# Altium PCB PCB1.PcbDoc
Units mm, origin at the board's own origin, x right, y up, seen from the top; angles counter-clockwise.
Board outline 52.13 x 53.59 mm, 2 copper layers (Top Layer, Bottom Layer); 16 components, 12 nets, 36 pads, 0 vias.
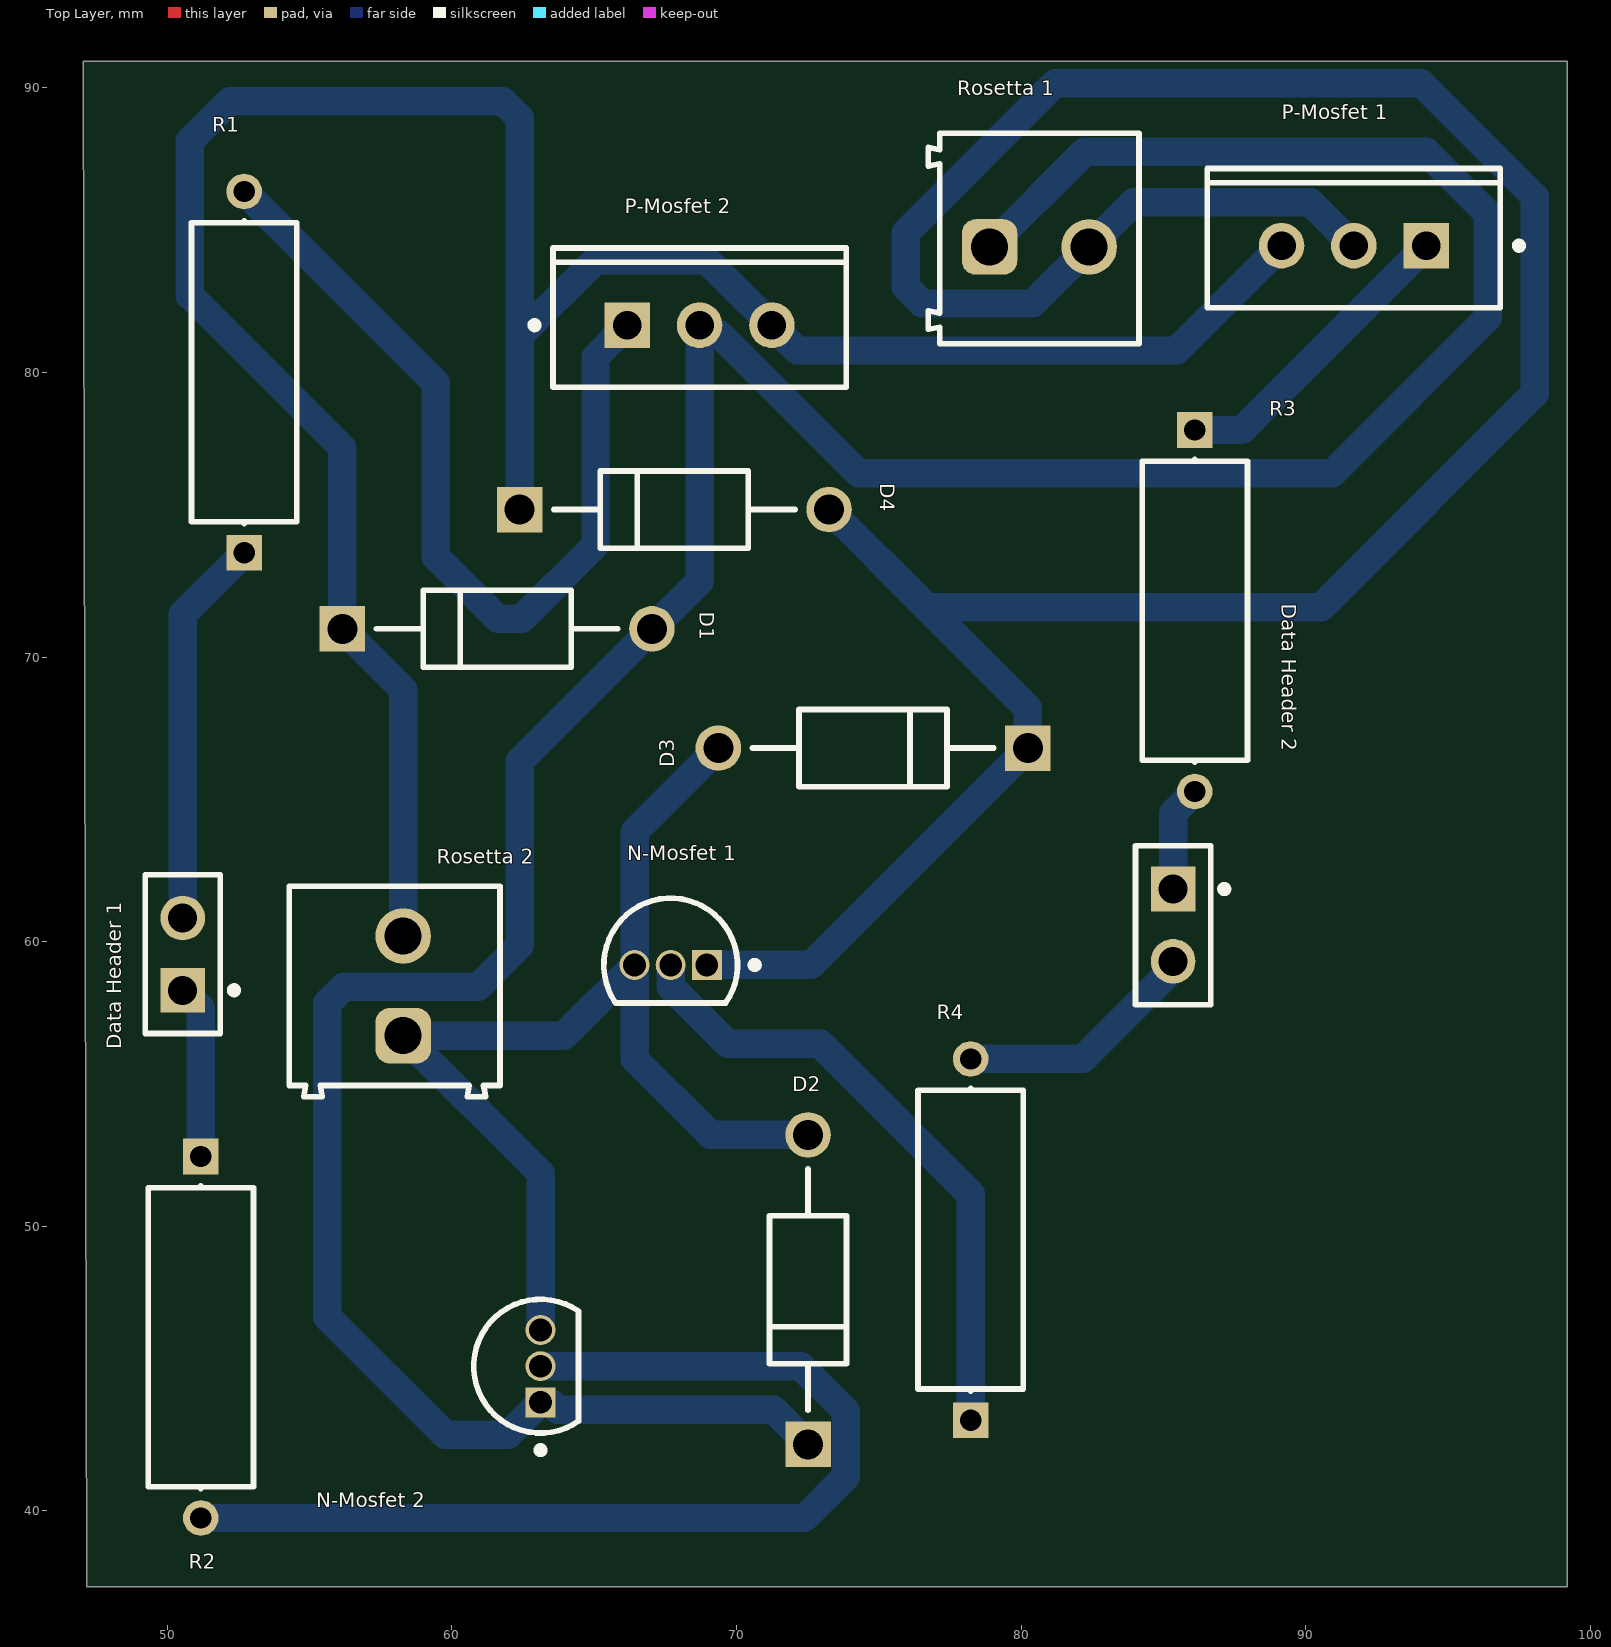
[diagram p0: Top Layer view]
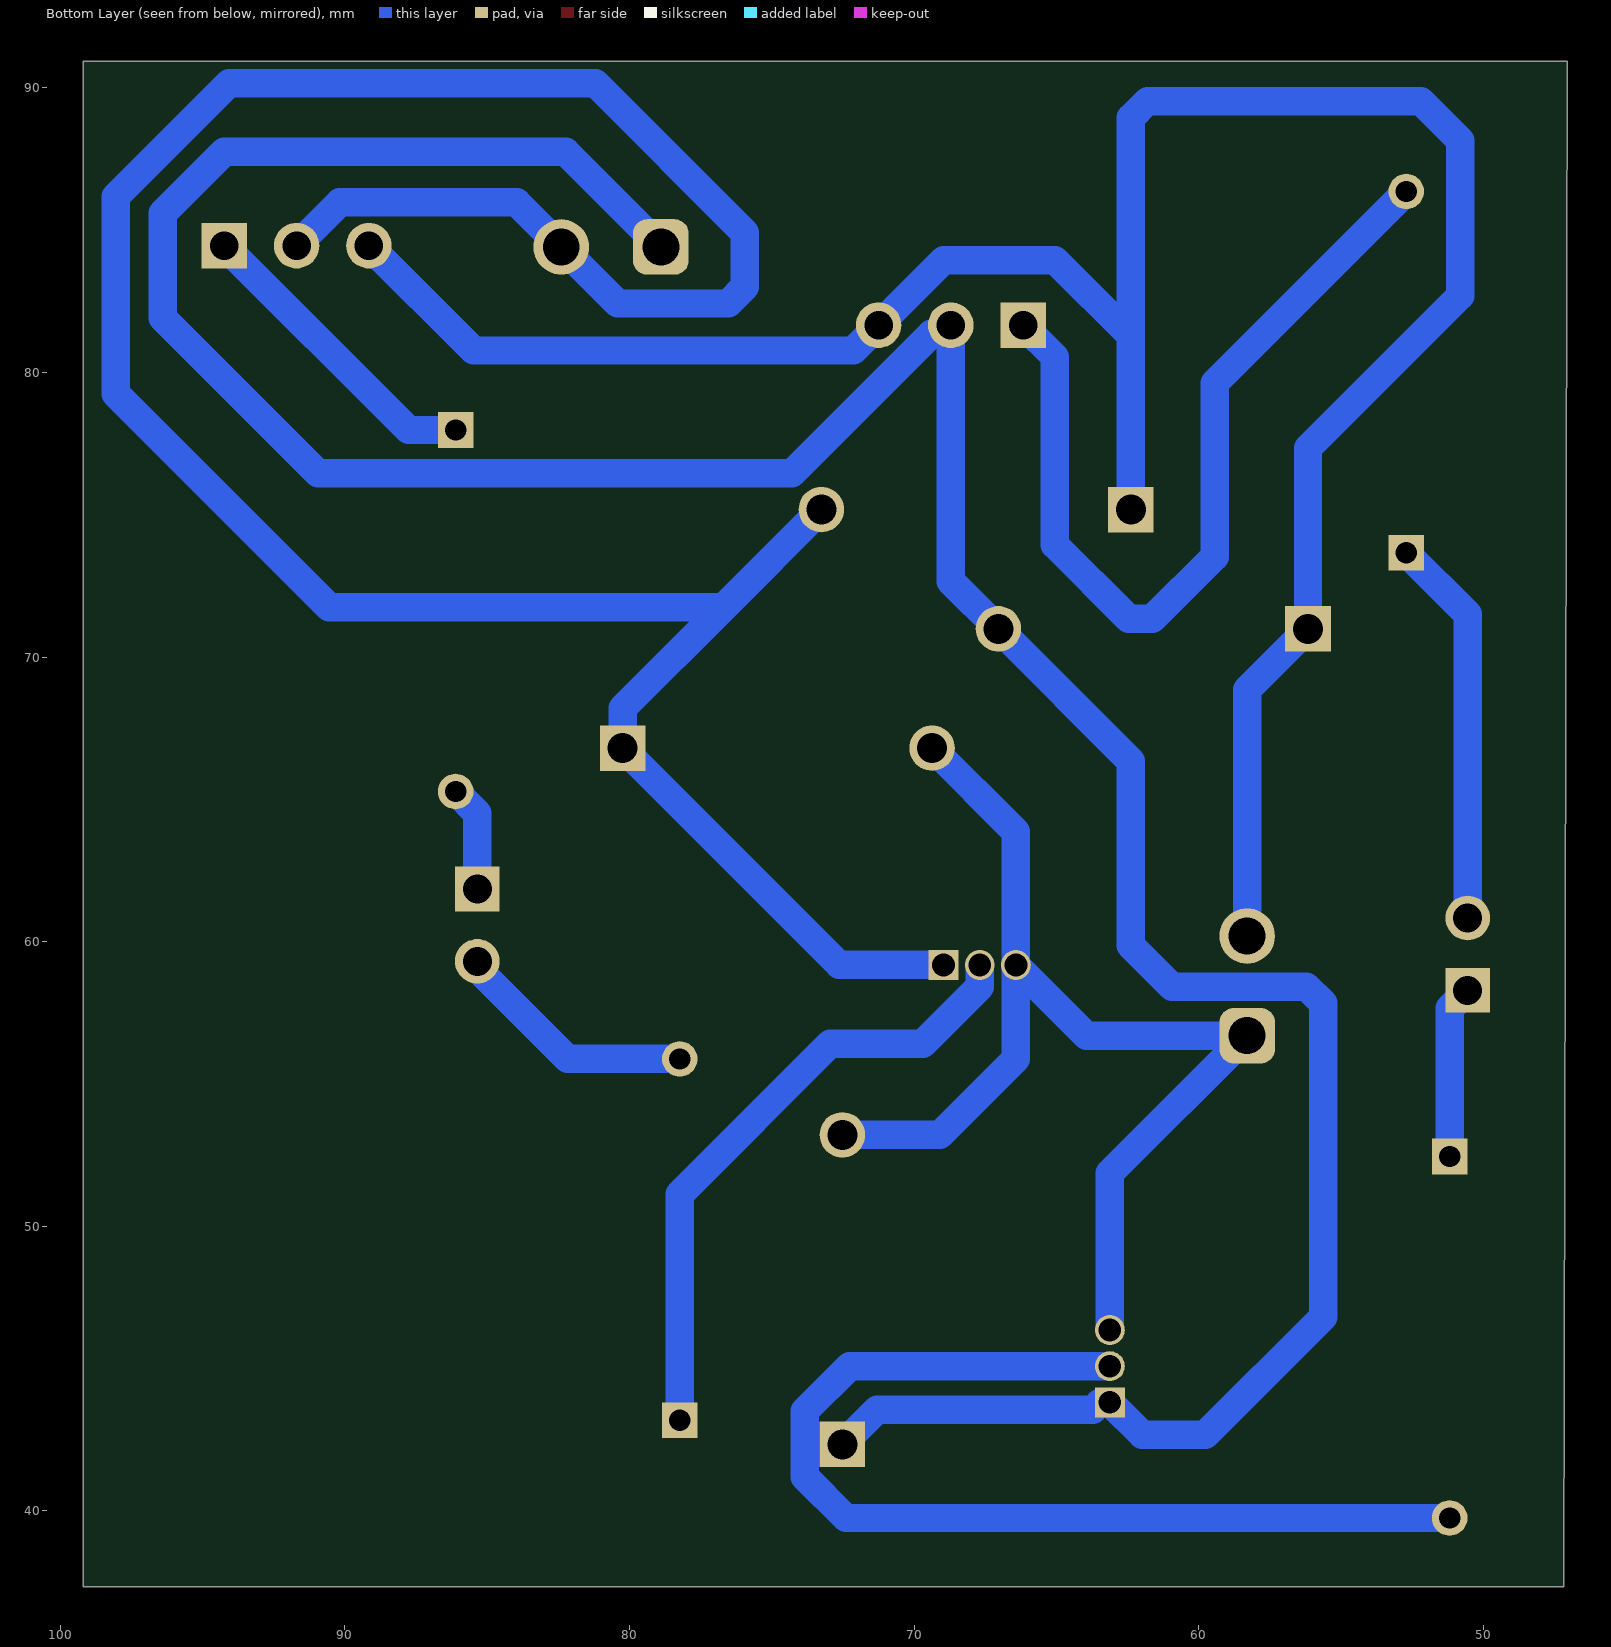
[diagram p1: Bottom Layer view, seen from below]
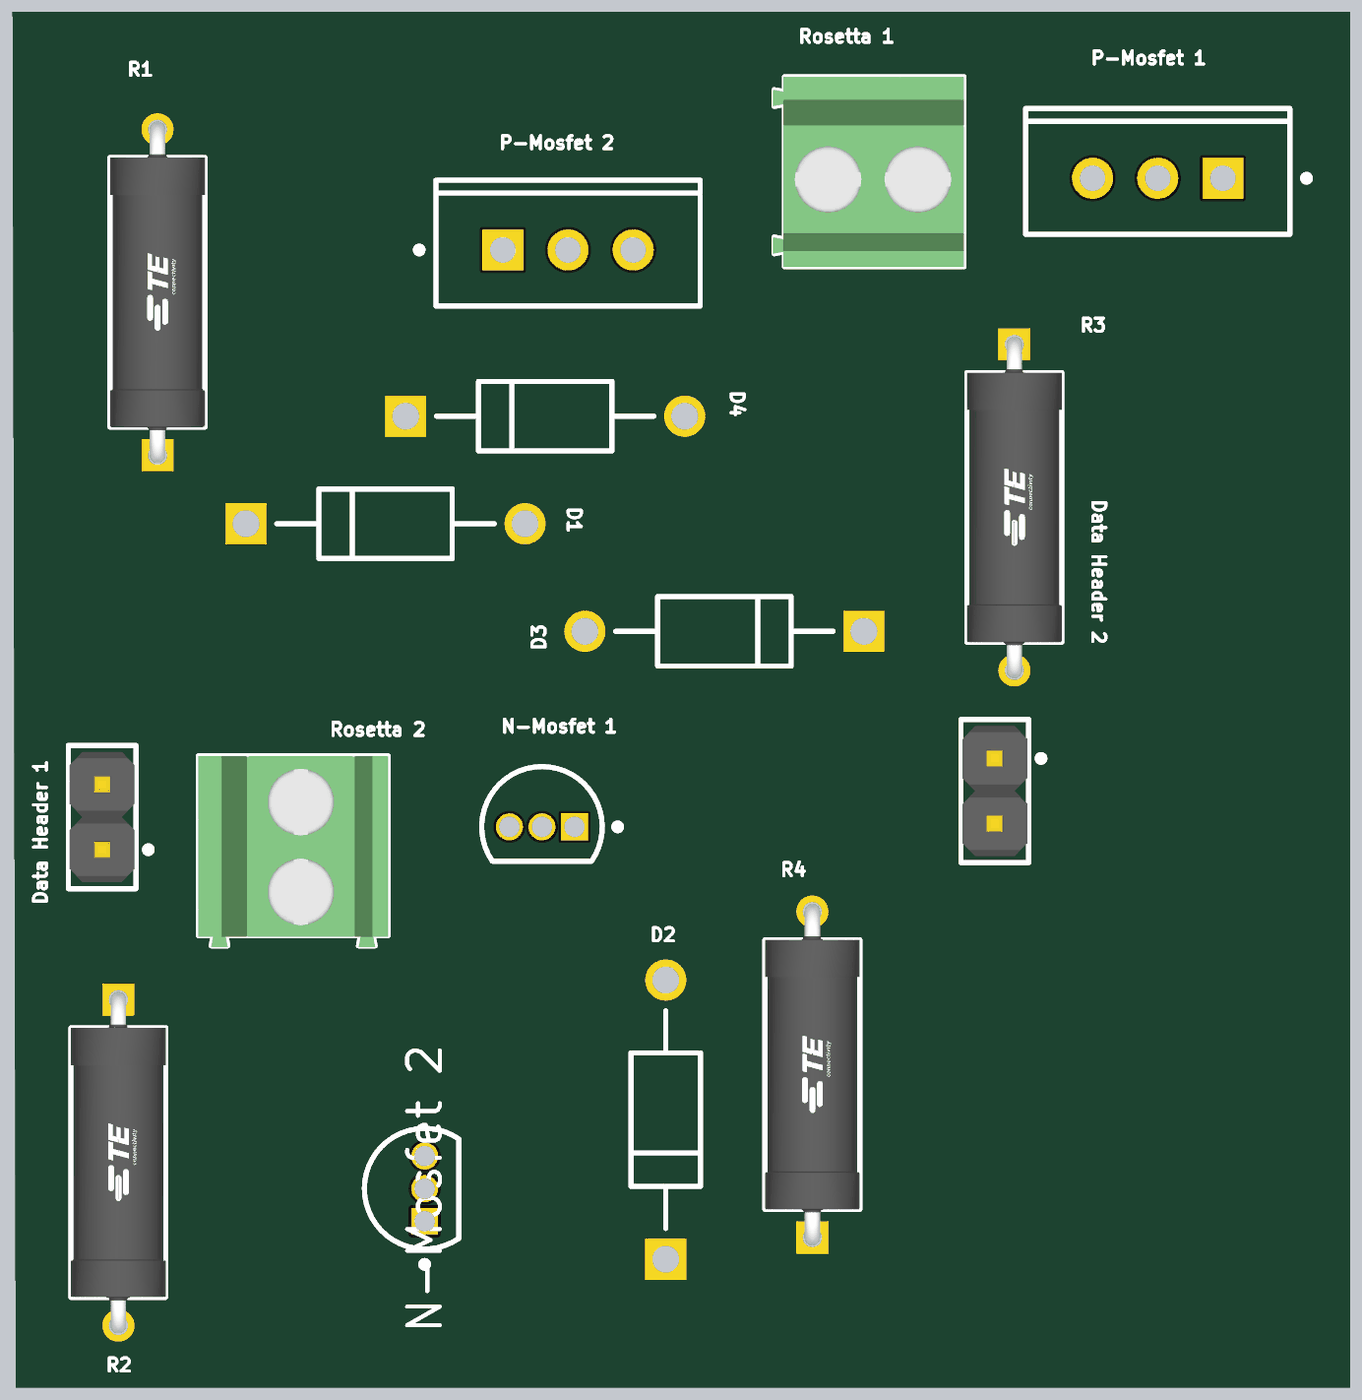
[diagram p2: 3D render of the assembled board from above, using the file's embedded part models]

## Layer stack, top to bottom
Top Solder: solder mask 0.0102, Solder Resist, Dk 3.5
Top Layer: signal copper 0.0356
Dielectric 1: dielectric 0.32, FR-4, Dk 4.8
Bottom Layer: signal copper 0.0356
Bottom Solder: solder mask 0.0102, Solder Resist, Dk 3.5

## Board outline
47.054,90.932 99.187,90.932 99.187,39.116 99.187,37.338 47.179,37.338

## Design rules (kind name [scope] priority, off if disabled: settings)
Clearance [All] p1: gap=0.01 ignorepadtopadclearanceinfootprint=FALSE
PolygonConnect [All] p1: connectstyle=Relief reliefconductorwidth=0.254 reliefentries=4 polygonreliefangle="90 Angle" airgapwidth=0.254
RoutingVias [All] p1: holewidth=0.711 width=1.27 viastyle="Through Hole" minholewidth=0.711 minwidth=1.27 maxholewidth=0.711 maxwidth=1.27
SolderMaskExpansion [All] p1: expansion=0.102 istentingtop=FALSE
UnRoutedNet [All] p1: checkbadconnections=TRUE
Width [All] p1: maxlimit=1 minlimit=0.75 preferedwidth=1
29 further rules are at their usual default settings.

## Components (designator, comment, footprint, x,y, rotation, side; value= is the part's Value field where it differs from the comment)
D1 "1N5817" FP-DO-41-MFG 61.595,70.993 r0 top
D2 "1N5817" FP-DO-41-MFG 72.517,47.775 r90 top
D3 "1N5817" FP-DO-41-MFG 74.803,66.802 r180 top
D4 "1N5817" FP-DO-41-MFG 67.818,75.184 r0 top
"Data Header 1" "M20-9990245" FP-M20-9990245-MFG 50.546,59.563 r90 top
"Data Header 2" "M20-9990245" FP-M20-9990245-MFG 85.344,60.579 r270 top
"N-Mosfet 1" "BS170" ONSC-TO-92-3-29-11 67.691,59.182 r180 top
"N-Mosfet 2" "BS170" ONSC-TO-92-3-29-11 63.119,45.085 r90 top
"P-Mosfet 1" "NTP2955" ONSC-TO-220-3-221A-09_AA#1 91.694,84.455 r90 top
"P-Mosfet 2" "NTP2955" ONSC-TO-220-3-221A-09_AA#2 68.707,81.661 r90 top
R1 "H45K0BAA" FP-H45K0BAA-MFG 52.705,80.01 r90 top
R2 "H45K0BAA" FP-H45K0BAA-MFG 51.181,46.101 r270 top
R3 "H45K0BAA" FP-H45K0BAA-MFG 86.106,71.628 r270 top
R4 "H45K0BAA" FP-H45K0BAA-MFG 78.232,49.53 r90 top
"Rosetta 1" "691214110002" 691214110002 80.645,84.709 r0 top
"Rosetta 2" "691214110002" 691214110002 57.993,58.448 r90 top

## Footprints (in the part's own frame and the unit in brackets; to place one, negate y for a bottom-side part, rotate by r counter-clockwise, add the part's x,y. Pads: shape width x height; smd on the part's side, far side on the other; paste and mask are expansions set on the pad)
691214110002 [mm] "3.50 mm Horizontal Entry Modular, 2p"
  rrect50% 1.95x1.95 hole 1.3: 1(-1.75,-0.3)
  round 1.95 hole 1.3: 2(1.75,-0.3)
  silkscreen extent -3.9,-3.7 3.5,3.7, body extent -3.95,-3.7 3.5,3.7, height 8.55
FP-DO-41-MFG [mm]
  rect 1.6x1.6 hole 1.05 paste-2539.97 mask+0: 1(-5.438,0)
  round 1.6 hole 1.05 paste-2539.97 mask+0: 2(5.438,0)
  silkscreen extent -4.24,-1.35 4.24,1.35
FP-H45K0BAA-MFG [mm]
  rect 1.25x1.25 hole 0.75 paste-2539.97 mask+0: 1(-6.35,0)
  round 1.25 hole 0.75 paste-2539.97 mask+0: 2(6.35,0)
  silkscreen extent -5.33,-1.85 5.33,1.85, body extent -7.07,-1.95 7.07,1.95, height 0.25
FP-M20-9990245-MFG [mm]
  rect 1.57x1.57 hole 1.02 paste-2539.97 mask+0: 1(-1.27,0)
  round 1.57 hole 1.02 paste-2539.97 mask+0: 2(1.27,0)
  silkscreen extent -2.79,-1.92 2.79,1.32, body extent -2.89,-1.42 2.89,1.42, height 0.25
ONSC-TO-92-3-29-11 [mm] "TO, 3-Leads, Body Dia 4.7mm, Pitch 1.27mm"
  rect 1.05x1.05 hole 0.8: 1(-1.27,0)
  round 1.05 hole 0.8: 2(0,0) 3(1.27,0)
  silkscreen extent -3.08,-2.35 2.35,1.34, body extent -2.35,-2.36 2.36,1.33, height 7.87
ONSC-TO-220-3-221A-09_AA#1 [mm] "FM, 3-Leads, Body 10.3x4.85mm, Pitch 2.54mm"
  rect 1.6x1.6 hole 1: 1(0,-2.54)
  round 1.6 hole 1: 2(0,0) 3(0,2.54)
  silkscreen extent -2.19,-5.93 2.72,5.15, body extent -2.16,-5.15 2.69,5.15, height 19.68
ONSC-TO-220-3-221A-09_AA#2 [mm] "FM, 3-Leads, Body 10.3x4.85mm, Pitch 2.54mm"
  rect 1.6x1.6 hole 1: 1(0,2.54)
  round 1.6 hole 1: 2(0,0) 3(0,-2.54)
  silkscreen extent -2.19,-5.15 2.72,5.92, body extent -2.16,-5.15 2.69,5.15, height 19.68

## Part data
D1 D2 D3 D4: library part CMP-12187-000037-1, "DIODE SCHOTTKY 20V 1A DO41", Average Rectified Current=1A, Capacitance=110pF, Case/Package=DO-41, Forward Voltage=450mV, Max Forward Surge Current (Ifsm)=25A, Max Operating Temperature=150°C, Max Repetitive Reverse Voltage (Vrrm)=20V, Max Reverse Current=500uA, Min Operating Temperature=-65°C, Package Quantity=2000, Current Rating=1A, Element Configuration=Single, Forward Current=1A, Height=2.7mm, Lead Free="Lead Free", Length=5.2mm, Max Reverse Leakage Current=500uA, Max Reverse Voltage (DC)=20V, Max Surge Current=25A, Mount="Through Hole", Number of Pins=2, Output Current=1A, Packaging="Cut Tape", Peak Non-Repetitive Surge Current=25A, Polarity=Standard, Radiation Hardening=No, REACH SVHC="No SVHC", RoHS Compliant=Yes, Series=-, Voltage Rating (DC)=20V, Weight=0.01lb, Width=2.7mm
"Data Header 1" "Data Header 2": library part CMP-15831-000105-1, "CONN HEADER VERT 2POS 2.54MM", Case/Package=SIL, Color=Black, Contact Resistance=25mR, Current=3A, Flammability Rating="UL94 V-0", Insulation Resistance=10GR, Max Operating Temperature=105°C, Min Operating Temperature=-40°C, Package Quantity=1000, Voltage=50V, Voltage Rating (AC)=750V, Connector Type="Male Pin", Contact Finish - Mating=GOLD, Contact Material=Brass, Contact Mating Length=0.24inch, Contact Plating=Gold, Contact Shape=Square, Contact Type="Male Pin", Current Rating=3A, Depth=2.54mm, Fastening Type=Pull, Gender=Male, Height=0.12inch, Housing Color=Black, Housing Material=Nylon, Insulation Color=Black, Insulation Material=Nylon, Lead Pitch=2.54mm, Length=5.08mm, Mated Stacking Heights=16.54mm, Mating Cycles=300, Max Current Rating=3A, Mount="Through Hole", Number Of Contacts=2, Number of Poles=2, Number of Positions=2, Number Of Rows=1, Orientation=Straight, Packaging=Bulk, Pitch=2.54mm, Radiation Hardening=No, Reach SVHC Compliant=Yes, Series=M20, Termination=Solder, Weight=0.25lb, Width=0.25inch, Working Voltage=750V
"N-Mosfet 1" "N-Mosfet 2": library part CMP-1058-00929-1, "Small Signal MOSFET, 500 mA, 60 V, N-Channel, 3-Pin TO-92, Bulk Box", Manufacturer="On Semiconductor", Package Type=TO-92, Channel Polarity="N Channel", ComponentLink1Description="Manufacturer URL", ComponentLink1URL=http://www.onsemi.com/, ComponentLink2Description=Datasheet, ComponentLink2URL=http://www.onsemi.com/pub_link/Collateral/BS170-D.PDF, ComponentLink3Description="Package Specification", ComponentLink3URL=http://www.onsemi.cn/pub_link/Collateral/2N6426-D.PDF, Configuration=Single, DatasheetVersion="Rev. 6", ID Max (A)=0.5, Mounting Technology="Through Hole", PackageDescription="3-Pin Transistor Outline, Body 4.825 x 3.685 mm, Pitch 1.27 mm", PackageReference=TO-92-3-29-11_AM_SL, PackageVersion="Rev. AM", Packing="Bulk Box", PartNumber=BS170, PD Max (W)=0.35, V(BR)DSS Min (V)=60, VGS Max (V)=20, VGS(th) Max (V)=3
"P-Mosfet 1" "P-Mosfet 2": library part CMP-1058-00865-1, "Power MOSFET, -60 V, -12 A, Single P-Channel, 3-Pin TO-220, Tube", Manufacturer="On Semiconductor", Package Type=TO-220-3, Channel Polarity="P Channel", Ciss Typ (pF)=507, ComponentLink1Description="Manufacturer URL", ComponentLink1URL=http://www.onsemi.com/, ComponentLink2Description=Datasheet, ComponentLink2URL=http://www.onsemi.cn/pub_link/Collateral/NTP2955-D.PDF, ComponentLink3Description="Package Specification", ComponentLink3URL=http://www.onsemi.com/pub_link/Collateral/MAC16C-D.PDF, Configuration=Single, Coss Typ (pF)=150, Crss Typ (pF)=48, DatasheetVersion="Rev. 2", ID Max (A)=12, Mounting Technology="Through Hole", PackageDescription="3-Pin Flange Mount, Vertical Straight Lead, Body 9.97 x 4.445 mm, Pitch 2.54 mm", PackageReference=TO-220-3-221A-09_AA, PackageVersion="Rev. AA", Packing=Tube, PartNumber=NTP2955, Qrr Typ (nC)=126, V(BR)DSS Min (V)=60, VGS Max (V)=20, VGS(th) Max (V)=4
R1 R2 R3 R4: library part CMP-03212-000004-1, "RES 5.00K OHM 1/2W 0.1% AXIAL", Case/Package=Axial, Max Operating Temperature=155°C, Max Power Dissipation=500mW, Min Operating Temperature=-55°C, Number of Resistors=1, Package Quantity=250, Resistance=5kR, Resistor Type="Thin Film", Temperature Coefficient=5ppm/°C, Tolerance=0.1%, Voltage Rating=350V, Contact Plating=Tin, Diameter=3.7mm, ELV=Compliant, Lead Diameter=0.6mm, Length=10mm, Mount=Axial, Number of Terminations=2, Packaging=Bulk, Power Rating=500mW, Radiation Hardening=No, RoHS Compliant=Yes, Series="Holco, Holsworthy", Termination=Axial, Weight=0.01411oz
"Rosetta 1" "Rosetta 2": library part CMP-1502-02464-2, Color="Blue, Green", Current=10A, Max Operating Temperature=105°C, Min Operating Temperature=-40°C, Voltage=300V, Contact Material=Brass, Contact Plating="Brass, Tin", Current Rating=10A, Height=8.7mm, Housing Material=Nylon, Lead Pitch=3.5mm, Length=7.4mm, Mount="Through Hole", NexarPartId=18818288, Number Of Contacts=2, Number of Levels=1, Number of Pins=2, Number of Positions Per Level=2, Number Of Rows=1, Packaging=Box, Pitch=3.5052mm, Plating="Brass, Steel", REACH SVHC=Unknown, RoHS=Compliant, Stripping Length=-6mm, Termination=Screw, Voltage Rating=300V, Width=7.9mm, Wire Gauge (Max)=24AWG, Wire Gauge (Min)=16AWG, Wire/Cable Gauge=24AWG

## Nets (pads, with @x,y where several pads share a name; then routed paths per layer and width w, separated by ;. In a path a pad name is that pad's centre, name@x,y a point inside that pad or via, vN(x,y) a via of type N, cw(c..) or ccw(c..) an arc to the next point about the centre after c; other vN are vias at no path point)
NetD1_1: "P-Mosfet 1.3" "P-Mosfet 2.3" "Rosetta 2.2" D1.1 D4.1 | length 87.9
  Bottom Layer w1: 58.293,60.198 58.293,68.857 D1.1 56.157,77.345 50.8,82.702 50.8,88.138 52.197,89.535 61.794,89.535 62.38,88.949 62.38,81.28 ; D4.1 62.38,81.28 ; 89.154,84.455 85.471,80.772 72.136,80.772 68.961,83.947 65.047,83.947 62.38,81.28
NetD1_2: "N-Mosfet 2.1" "P-Mosfet 2.2" "Rosetta 1.1" D1.2 D2.1 | length 118.3
  Bottom Layer w1: D2.1 71.293,43.561 63.716,43.561 63.487,43.79 63.144,43.79 63.119,43.815 61.976,42.672 59.766,42.672 55.626,46.812 55.626,57.834 56.212,58.42 60.935,58.42 62.382,59.868 62.382,66.342 D1.2 68.707,72.667 68.707,81.661 68.869,81.661 69.169,81.361 69.388,81.361 74.295,76.454 90.932,76.454 96.393,81.915 96.393,85.598 94.234,87.757 82.243,87.757 78.895,84.409
NetD2_2: "N-Mosfet 1.3" "N-Mosfet 2.3" "Rosetta 2.1" D2.2 D3.2 | length 40.8
  Bottom Layer w1: 63.119,46.355 63.119,51.872 58.293,56.698 63.937,56.698 66.421,59.182 ; D3.2 66.421,63.858 66.421,59.182 ; D2.2 69.088,53.213 66.421,55.88 66.421,59.182
NetD3_1: "N-Mosfet 1.1" "P-Mosfet 1.2" "Rosetta 1.2" D3.1 D4.2 | length 103
  Bottom Layer w1: 68.961,59.182 72.621,59.182 D3.1 80.241,68.199 76.685,71.755 ; D4.2 76.685,71.755 ; 91.694,84.455 90.17,85.979 83.965,85.979 80.409,82.423 76.532,82.423 75.946,83.009 75.946,84.912 81.204,90.17 94.056,90.17 98.044,86.182 98.044,79.248 90.551,71.755 76.685,71.755
"NetData Header 1_1": "Data Header 1.1" R2.1 | length 6.2
  Bottom Layer w1: 50.507,58.332 51.181,57.658 R2.1
"NetData Header 1_2": "Data Header 1.2" R1.1 | length 14
  Bottom Layer w1: 50.546,60.57 50.546,71.501 R1.1
"NetData Header 2_1": "Data Header 2.1" R3.2 | length 3.7
  Bottom Layer w1: 85.344,61.849 85.344,64.516 R3.2
"NetData Header 2_2": "Data Header 2.2" R4.2 | length 8.6
  Bottom Layer w1: R4.2 82.169,55.88 85.471,59.182
"NetN-Mosfet 1_2": "N-Mosfet 1.2" R4.1 | length 22.4
  Bottom Layer w1: 67.691,59.182 67.691,58.42 69.698,56.413 72.949,56.413 78.232,51.13 R4.1@78.232,43.055
"NetN-Mosfet 2_2": "N-Mosfet 2.2" R2.2 | length 36.9
  Bottom Layer w1: R2.2 72.39,39.751 73.838,41.199 73.838,43.51 72.263,45.085 63.119,45.085
"NetP-Mosfet 1_1": "P-Mosfet 1.1" R3.1 | length 10.8
  Bottom Layer w1: R3.1 87.757,77.978 94.234,84.455
"NetP-Mosfet 2_1": "P-Mosfet 2.1" R1.2 | length 31.4
  Bottom Layer w1: R1.2 59.436,79.629 59.436,73.533 61.625,71.344 62.454,71.344 65.049,73.939 65.049,80.543 66.167,81.661